# EAGLE board Drawdio (EAGLE 5.10)
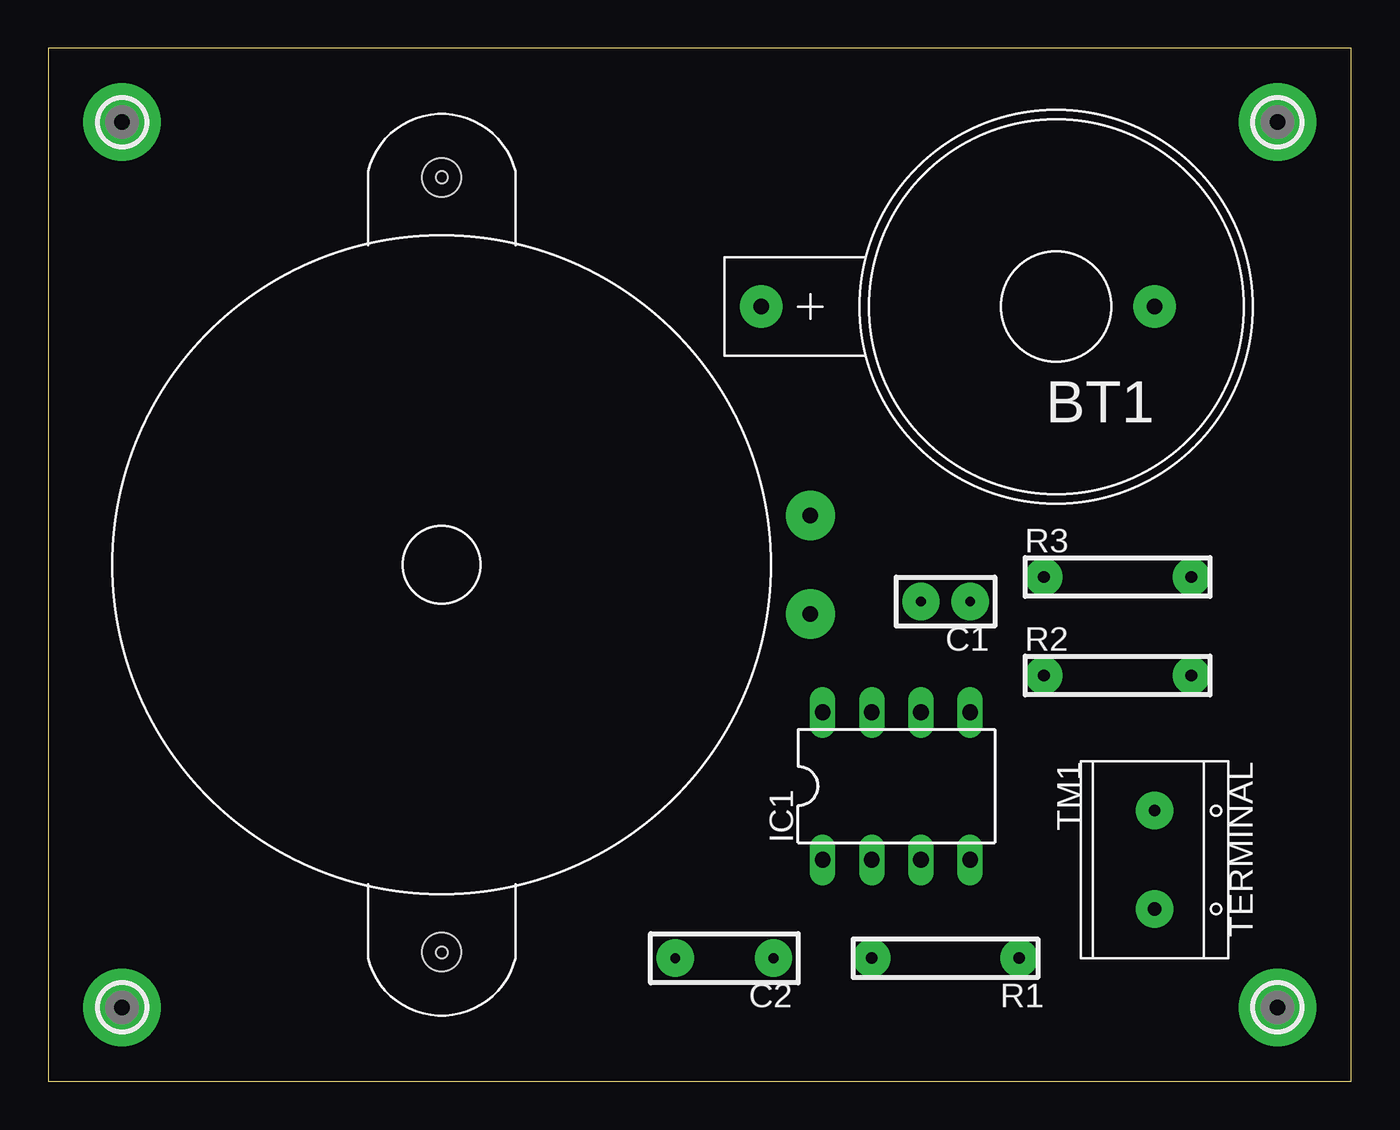
[diagram p0: board, top side]
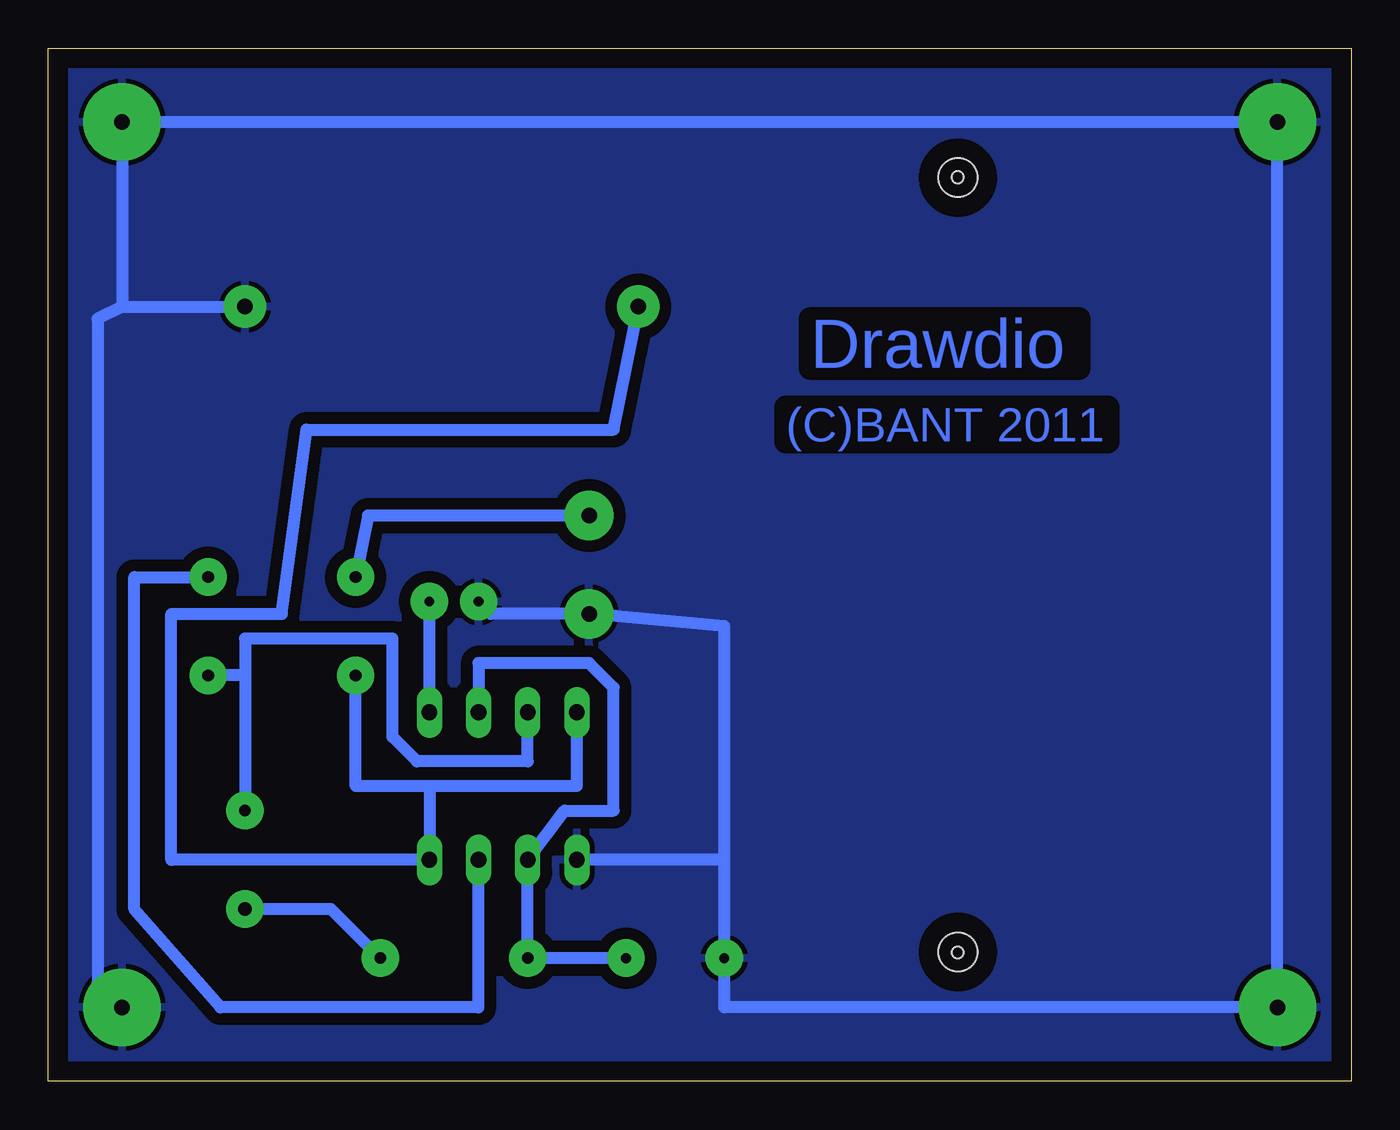
[diagram p1: board, bottom side, seen from below]

Size 67.31 x 53.34 mm. Coordinates in mm from the lower left corner, seen from the top.
Outline: 0,0 67.31,0 67.31,53.34 0,53.34 0,0
Copper layers (1*16): Top 0.035mm / dielectric 1.5mm / Bottom 0.035mm
Design rules "default": minimum track width 10mil, minimum drill 24mil, track to track 8mil, track to pad 8mil, pad to pad 8mil, via to via 8mil, smd to smd 8mil, copper to edge 40mil, drill to drill 8mil, minimum pad ring 10mil, minimum via ring 8mil, stop-mask expansion 4mil, vias tented up to drill 0mil, thermal gap 10mil
Holes 0.6 mm at 20.32,46.69 20.32,6.65

## Footprints (pad centres in the part's own frame; a part is rotated, then mirrored left to right if it is on the bottom)
CH25-2032 = drill 0.813 pad 2.184 round: P$1 15.24,0; P$2 -5.08,0
KYOCERA01 = drill 0.8 pad 2.54 round: + 19.05,2.54; - 19.05,-2.54 | hole 2: 0,20; 0,-20
CAP_DIP_1 = drill 0.5 pad 1.93 round: 1 -1.27,0; 2 1.27,0
CAP_DIP_2 = drill 0.5 pad 1.93 round: 1 -2.54,0; 2 2.54,0
DIL08 = drill 0.813 long: 1 -3.81,-3.81; 2 -1.27,-3.81; 3 1.27,-3.81; 4 3.81,-3.81; 5 3.81,3.81; 6 1.27,3.81; 7 -1.27,3.81; 8 -3.81,3.81
PAD-2.1 = drill 0.8 pad 4 round: B2,1 0,0
R_0.125W_3 = drill 0.6 pad 1.93 round: 1 -3.81,0; 2 3.81,0
TERMINAL = drill 0.6 pad 1.93 round: P$1 -2.54,0 | drill 0.7 pad 1.93 round: P$2 2.54,0

## Placement (x,y rotation side)
BT1  3V  [CH25-2032]  52.07,40.01 180 top
BZ1  BUZZER  [KYOCERA01]  20.32,26.67 0 top
C1  0.1uF  [CAP_DIP_1]  46.35,24.77 0 top
C2  680pF  [CAP_DIP_2]  34.92,6.35 0 top
IC1  LMC555CN  [DIL08]  43.81,15.24 0 top
MT1  MOUNT-PAD2.1  [PAD-2.1]  63.5,49.53 0 top
MT2  MOUNT-PAD2.1  [PAD-2.1]  63.5,3.81 0 top
MT3  MOUNT-PAD2.1  [PAD-2.1]  3.81,49.53 0 top
MT4  MOUNT-PAD2.1  [PAD-2.1]  3.81,3.81 0 top
R1  470K  [R_0.125W_3]  46.35,6.35 180 top
R2  10K  [R_0.125W_3]  55.24,20.95 180 top
R3  100  [R_0.125W_3]  55.24,26.04 180 top
TM1  TERMINAL  [TERMINAL]  57.15,11.43 270 top

## Library data of the parts
BT1 = battery
BZ1 = buzzer
C1 C2 MT1-MT4 R1-R3 = MyLib
IC1 = linear4
TM1 = bant

## Nets
GND: BT1.P$2 BZ1.- C1.1 C2.1 IC1.1 MT1.B2,1 MT2.B2,1 MT3.B2,1 MT4.B2,1
N$1: C2.2 IC1.2 IC1.6 R1.2
N$2: IC1.3 R3.1
N$3: R1.1 TM1.P$2
N$4: BZ1.+ R3.2
N$5: IC1.7 R2.1 TM1.P$1
N$6: C1.2 IC1.5
VCC: BT1.P$1 IC1.4 IC1.8 R2.2

## Tracks (layer width: path | path; a pad name or v marks a point on that pad's centre or on a via)
GND
  Bottom 0.61: 63.5,40.01 64.77,39.37 64.77,5.08 MT2.B2,1 | 63.5,40.01 BT1.P$2 | C1.1 44.45,24.13 BZ1.- 32.38,23.5 32.38,11.43 | 63.5,40.01 MT1.B2,1 MT3.B2,1 MT4.B2,1 32.38,3.81 C2.1 32.38,11.43 | 32.38,11.43 IC1.1
  pour Bottom (isolate 0.61): 0,53.34 0,0 67.31,0 67.31,53.34
N$1
  Bottom 0.61: IC1.6 45.09,21.59 39.37,21.59 38.1,20.32 38.1,13.97 40.64,13.97 IC1.2 R1.2 C2.2
N$2
  Bottom 0.61: IC1.3 45.09,3.81 58.42,3.81 62.87,8.89 62.87,26.04 R3.1
N$3
  Bottom 0.61: R1.1 52.7,8.89 TM1.P$2
N$4
  Bottom 0.61: BZ1.+ 50.8,29.21 R3.2
N$5
  Bottom 0.61: IC1.7 42.55,16.51 48.26,16.51 49.53,17.78 49.53,22.86 57.15,22.86 57.15,20.95 | 57.15,20.95 TM1.P$1 | 57.15,20.95 R2.1
N$6
  Bottom 0.61: IC1.5 C1.2
VCC
  Bottom 0.61: IC1.8 40.01,15.24 47.62,15.24 | 47.62,15.24 51.44,15.24 R2.2 | BT1.P$1 38.1,33.66 53.98,33.66 55.24,24.13 60.96,24.13 60.96,11.43 IC1.4 47.62,15.24

## Text on the board
Bottom: Drawdio | (C)BANT 2011